# Altium PCB PCB1.PcbDoc
Units mil, origin at the board's own origin, x right, y up, seen from the top; angles counter-clockwise.
Board outline 2120 x 2320 mil, 2 copper layers (Top Layer, Bottom Layer); 22 components, 10 nets, 59 pads, 12 vias.
Unrouted connection lines stored in the file: 2.
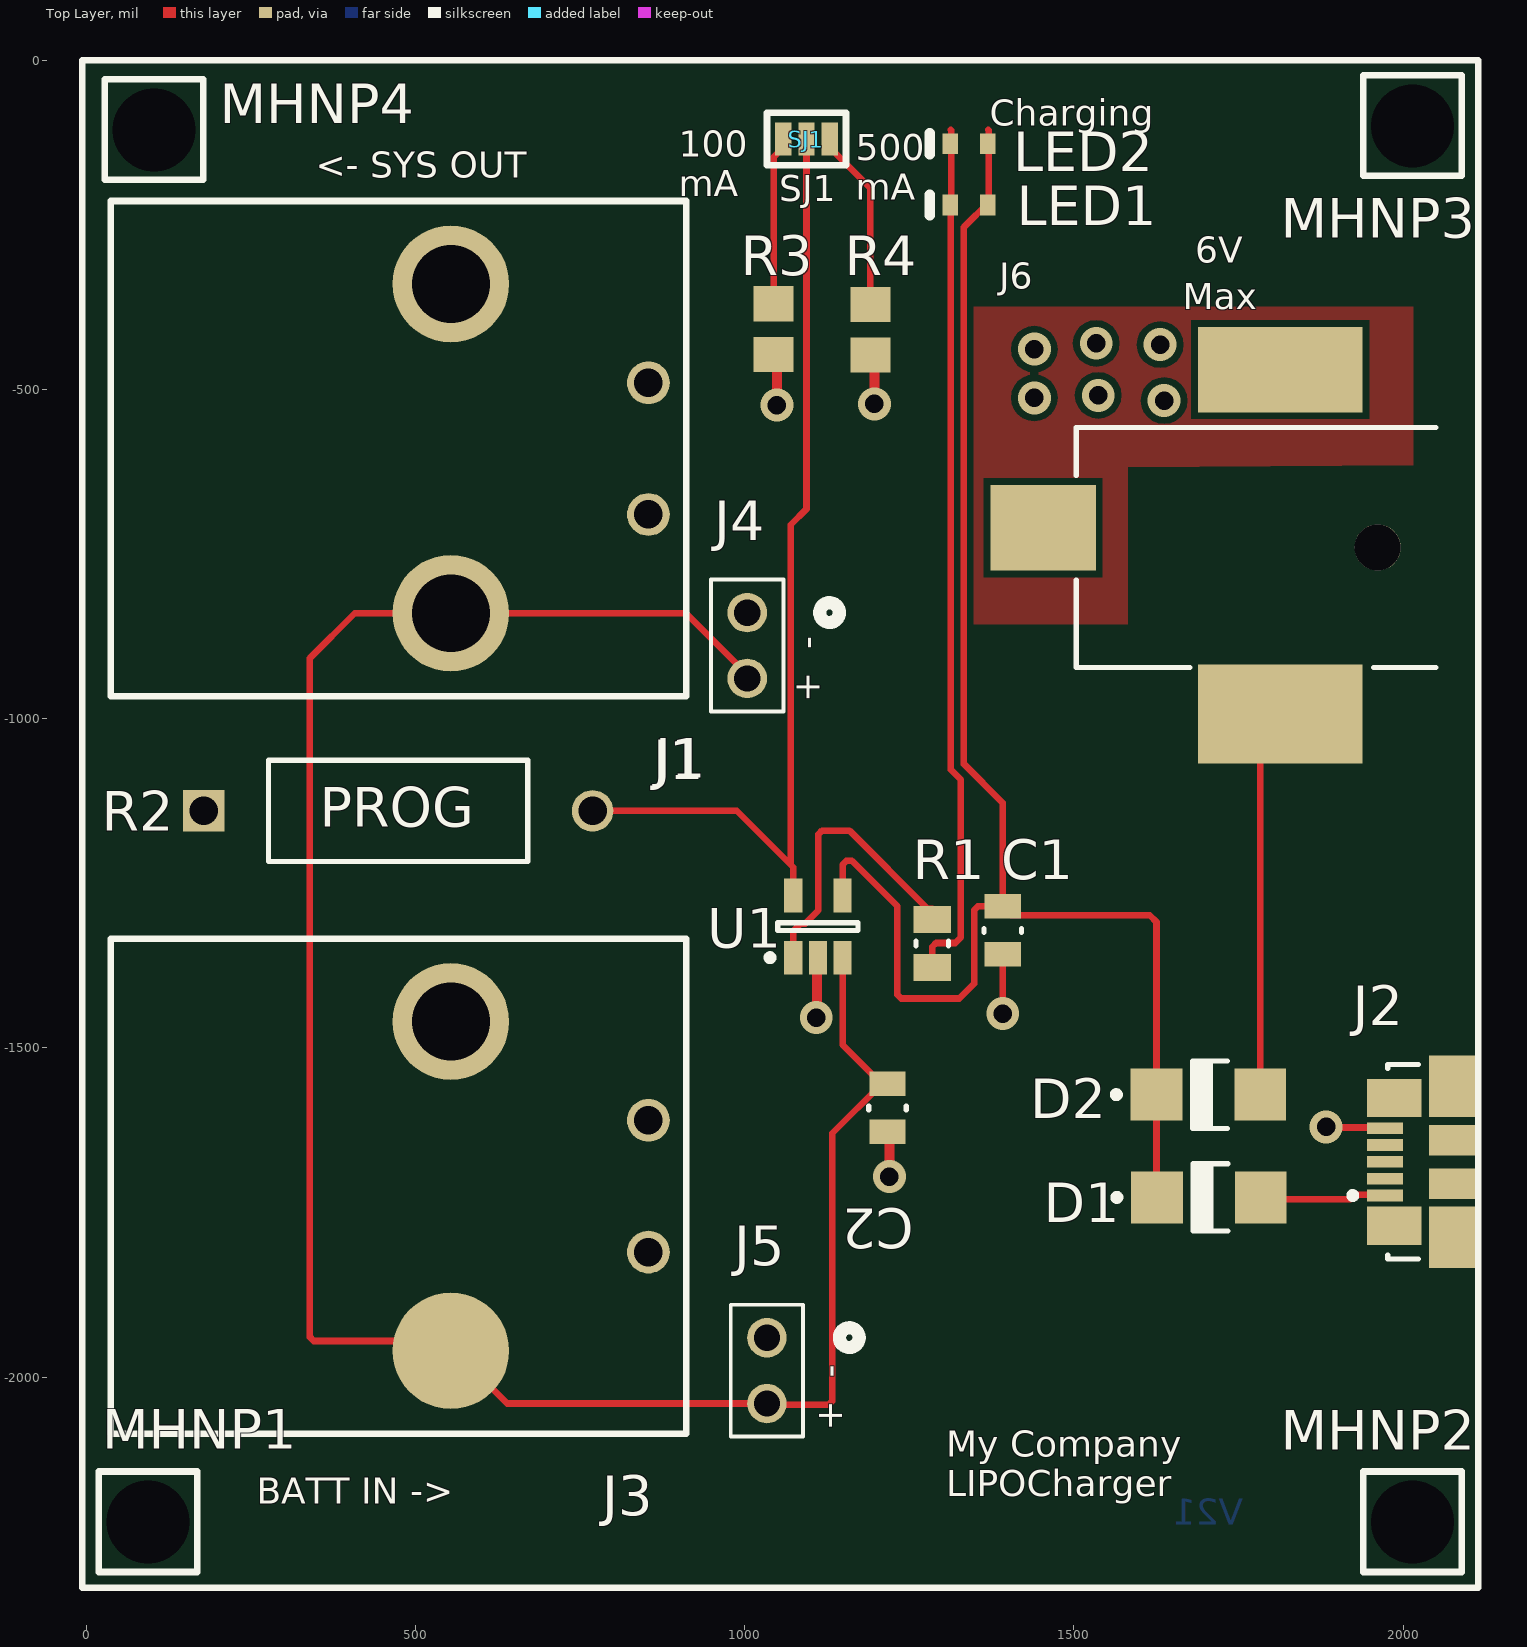
[diagram p0: Top Layer view]
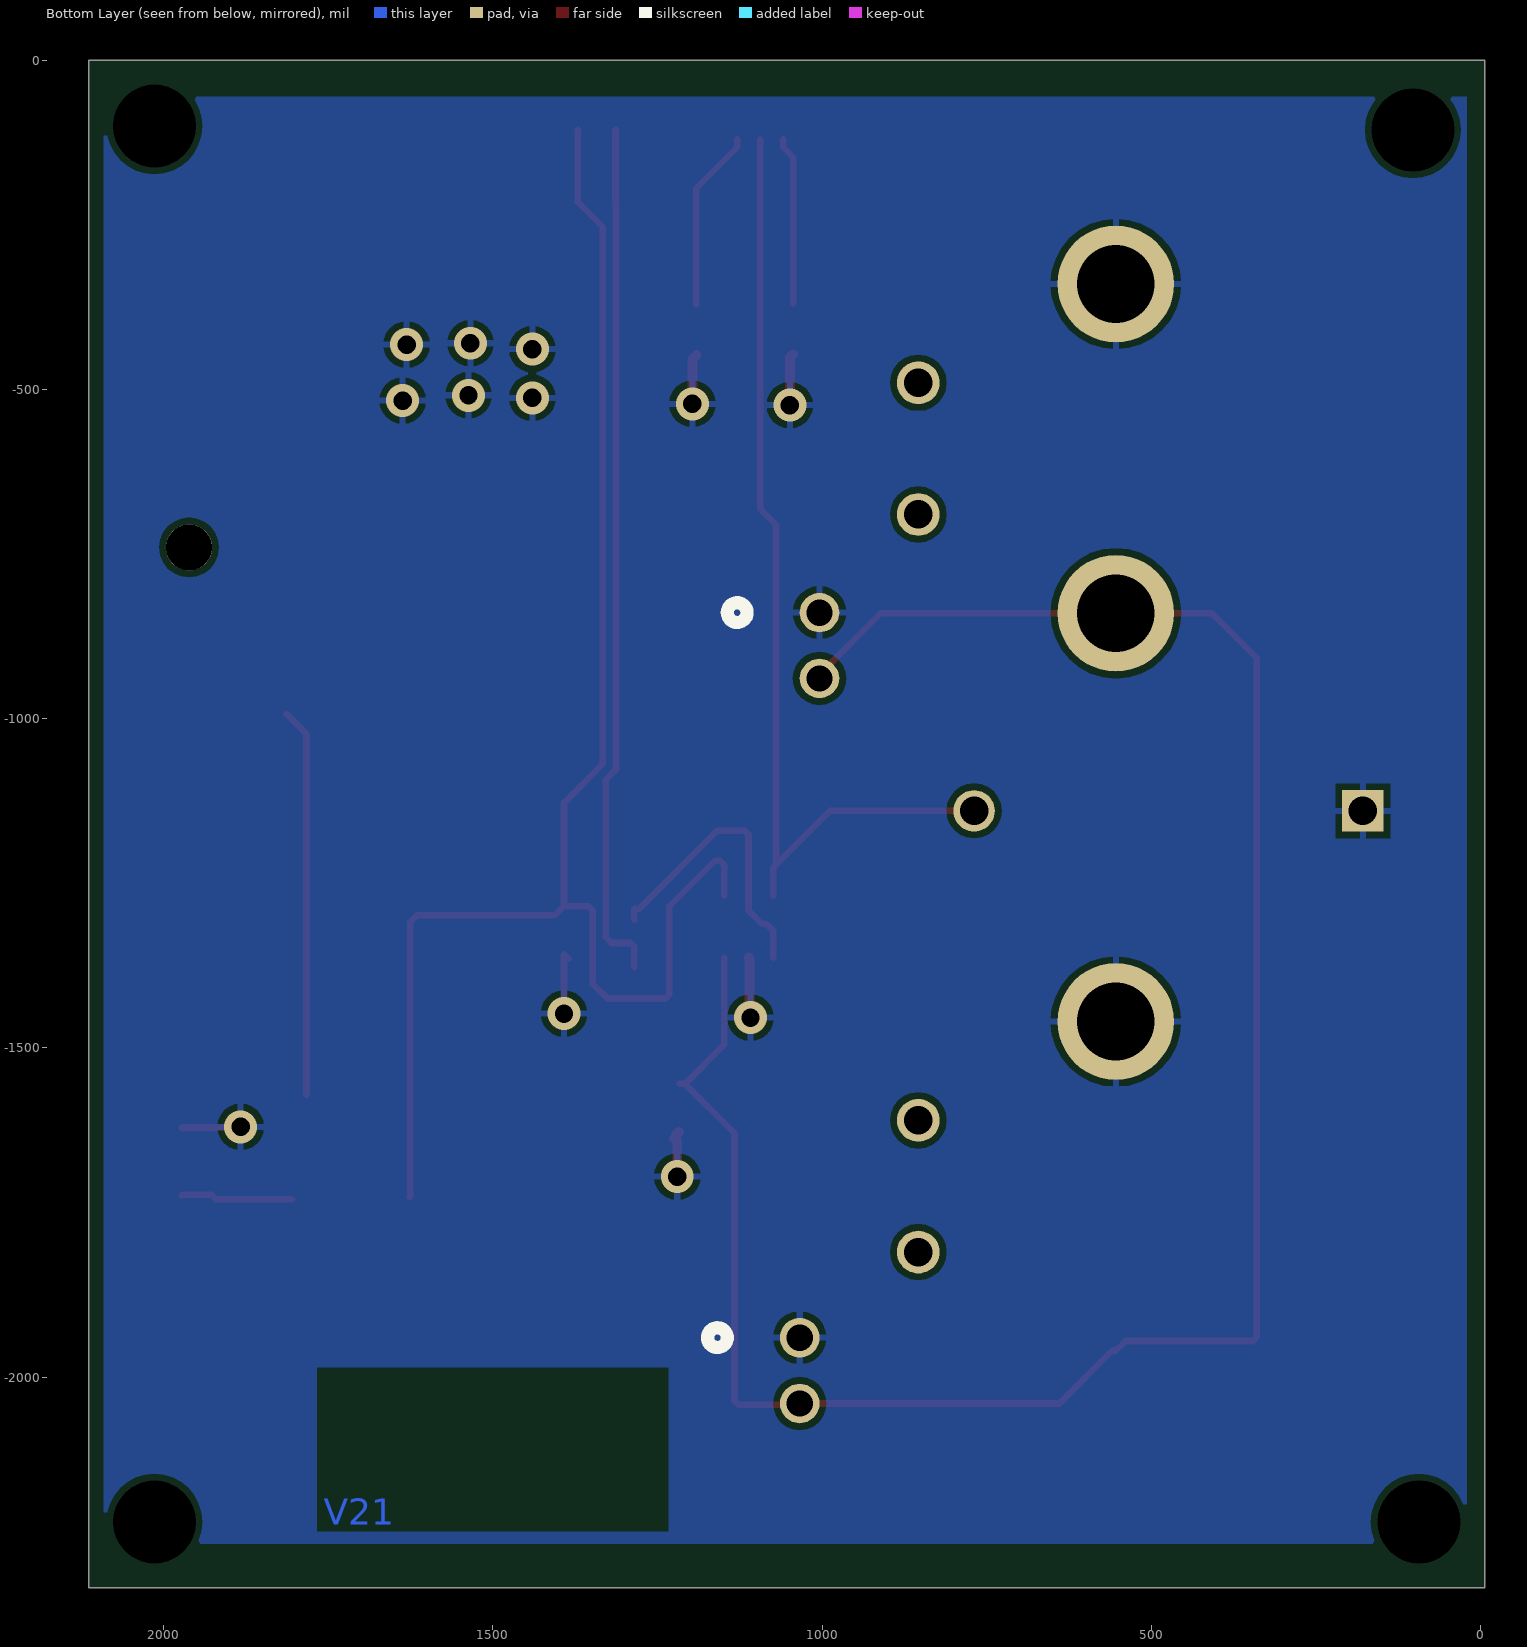
[diagram p1: Bottom Layer view, seen from below]

## Layer stack, top to bottom
Top Solder: solder mask 0.4, Solder Resist, Dk 3.5
Top Layer: signal copper 1.4
Dielectric 1: dielectric 12.6, FR-4, Dk 4.8
Bottom Layer: signal copper 1.4
Bottom Solder: solder mask 0.4, Solder Resist, Dk 3.5

## Board outline
-6,-2320 2114,-2320 2114,0 -6,0

## Design rules (kind name [scope] priority, off if disabled: settings)
Clearance [All] p1: gap=10 ignorepadtopadclearanceinfootprint=TRUE except(0: Arc-Hole Track-Hole SMDPad-Hole THPad-Hole Via-Hole Fill-Hole Poly-Hole Region-Hole Text-Hole)
PolygonConnect [All] p1: connectstyle=Relief reliefconductorwidth=10 reliefentries=4 polygonreliefangle="90 Angle" airgapwidth=10
RoutingVias [All] p1: holewidth=28 width=50 viastyle="Through Hole" minholewidth=28 minwidth=50 maxholewidth=28 maxwidth=50
SolderMaskExpansion [All] p1: expansion=4 istentingtop=FALSE
Width [All] p1: maxlimit=40 minlimit=10 preferedwidth=10
30 further rules are at their usual default settings.

## Components (designator, comment, footprint, x,y, rotation, side; value= is the part's Value field where it differs from the comment)
C1 "4.7uF" FP-CC0805-0_85-MFG 1392,-1321.42 r270 top value="4.7 uF"
C2 "4.7uF" FP-CC0805-0_85-MFG 1217,-1591 r270 top value="4.7 uF"
D1 "40V, 1A" ONSC-SMA-2-403D-02_V 1705,-1727 r0 top
D2 "40V, 1A" ONSC-SMA-2-403D-02_V 1704.26,-1571 r0 top
J1 "CONN HEADER R/A 2POS 5.08MM" 1-179276-2#1 554,-340 r270 top
J2 "47346-0001" MOLX-47346-0001-5_V 2069.13,-1673.03 r90 top
J3 "CONN HEADER R/A 2POS 5.08MM" 1-179276-2#2 554,-1460 r270 top
J4 "2 POS VERT HEADER 0.100\"" 2Pins_AMP 1004,-839 r180 top
J5 "2 POS VERT HEADER 0.100\"" 2Pins_AMP 1034,-1940 r180 top
J6 "CONN PWR JACK 2.1X5.5MM SOLDER" FP-RASM722PTR13X-MFG 1794,-740 r90 top
LED1 "RED" VISH-TLMS1000_V 1341,-220 r180 top
LED2 "RED" VISH-TLMS1000_V 1341,-127 r180 top
MHNP1 "Mounting Hole Non-Plated 3.2mm" MTHNP3P2MM 94,-2220 r90 top
MHNP2 "Mounting Hole Non-Plated 3.2mm" MTHNP3P2MM 2014,-2220 r90 top
MHNP3 "Mounting Hole Non-Plated 3.2mm" MTHNP3P2MM 2014,-100 r90 top
MHNP4 "Mounting Hole Non-Plated 3.2mm" MTHNP3P2MM 103,-106 r90 top
R1 "330" RESC2013X50X30NL20T20 1285,-1341.42 r90 top
R2 "PROG" VISH-A1-2_V2 474,-1140 r0 top
R3 "2k" RESC2013X70X40ML20T20 1044,-408.39 r270 top
R4 "10k" RESC2013X70X40ML20T20 1191,-409.61 r90 top
SJ1 "SJUMPER3POS" SJUMPER3POS-Footprint-1 1094,-120 r0 top
U1 "Charge Management Controller" SOT-23-OT5_M 1111.4,-1315.76 r90 top

## Footprints (in the part's own frame and the unit in brackets; to place one, negate y for a bottom-side part, rotate by r counter-clockwise, add the part's x,y. Pads: shape width x height; smd on the part's side, far side on the other; paste and mask are expansions set on the pad)
1-179276-2#1 [mm]
  round 4.5 hole 3: 1(0,0) 2(12.7,0)
  round 1.65 hole 1.1: ""(3.81,7.62) ""(8.89,7.62)
  silkscreen extent -3.2,-13.13 15.9,9.08, body extent -3.02,-13.55 16.06,8.55, height 10.86
1-179276-2#2 [mm]
  round 4.5 hole 3: 1(0,0)
  round 4.5 smd: 2(12.7,0)
  round 1.65 hole 1.1: ""(3.81,7.62) ""(8.89,7.62)
  silkscreen extent -3.2,-13.13 15.9,9.08, body extent -3.02,-13.55 16.06,8.55, height 10.86
2Pins_AMP [mil]
  round 60 hole 40 mask+0: 1(0,0) 2(0,100)
  silkscreen extent -140,-50 55,150, body extent 0,0 10,10, height 10
FP-CC0805-0_85-MFG [mm]
  rect 0.95x1.4 smd paste+0 mask+0: 1(-0.925,0) 2(0.925,0)
  silkscreen extent -0.08,-0.72 0.08,0.72, body extent -1.6,-1.05 1.6,1.05, height 0.25
FP-RASM722PTR13X-MFG [mm]
  rect 3.3x4.06 smd paste+0 mask+0: 1(0.76,8.65)
  rect 3.81x6.35 smd paste+0 mask+0: 2(-6.43,-0.49)
  rect 3.3x6.35 smd paste+0 mask+0: 3(6.86,-0.49)
  round 1.78 hole 1.78 unplated paste-1000 mask+0: ""(0,-4.25)
  silkscreen extent -4.63,-6.5 4.63,7.38, body extent -8.43,-7.48 8.61,10.78, height 0.25
MOLX-47346-0001-5_V [mm] "SMD, 5-Leads, Body 7.5x5mm, Pitch 0.65mm"
  rect 0.45x1.38 smd: 1(-1.3,2.46) 2(-0.65,2.46) 3(0,2.46) 4(0.65,2.46) 5(1.3,2.46)
  rect 1.475x2.1 smd: 6(-2.462,2.1) 7(2.462,2.1)
  rect 2.375x1.9 smd: 8(-2.913,-0.2) 11(2.913,-0.2)
  rect 1.175x1.9 smd: 9(-0.837,-0.2) 10(0.837,-0.2)
  silkscreen extent -3.75,1.16 3.75,3.82, body extent -3.99,-2.78 3.99,2.65, height 2.69
MTHNP3P2MM [mm]
  round 1 hole 3.2: ""(0,0)
  silkscreen extent -1.92,-1.9 1.95,1.9
ONSC-SMA-2-403D-02_V [mm]
  rect 2x2 smd: 1(-2,0) 2(2,0)
  silkscreen extent -3.67,-1.3 0.74,1.3, body extent -2.16,-1.3 2.16,1.3, height 2.2
RESC2013X50X30NL20T20 [mm]
  rect 1.05x1.45 smd: 1(-0.925,0) 2(0.925,0)
  silkscreen extent -0.1,-0.63 0.1,0.63, body extent -1.1,-0.72 1.1,0.72, height 0.5
RESC2013X70X40ML20T20 [mm]
  rect 1.35x1.55 smd: 1(-0.975,0) 2(0.975,0)
  body extent -1.1,-0.72 1.1,0.72, height 0.7
SJUMPER3POS-Footprint-1 [mil]
  rect 25x50 smd: 1(-35,0) 2(0,0) 3(35,0)
  silkscreen extent -60,-40 60,40
SOT-23-OT5_M [mm]
  rect 1.3x0.7 smd: 1(-1.2,0.95) 2(-1.2,0) 3(-1.2,-0.95) 4(1.2,-0.95) 5(1.2,0.95)
  silkscreen extent -1.32,-1.55 0.15,1.97, body extent -0.9,-1.55 0.9,1.55, height 1.45
VISH-A1-2_V2 [mm]
  rect 1.6x1.6 hole 1.1: 1(-7.5,0)
  round 1.6 hole 1.1: 2(7.5,0)
  silkscreen extent -5,-1.95 5,1.95, body extent -7.91,-1.95 7.92,1.95, height 3.88
VISH-TLMS1000_V [mm]
  rect 0.6x0.8 smd: 1(-0.725,0) 2(0.725,0)
  silkscreen extent 1.52,-0.4 1.52,0.4, body extent -0.8,-0.4 0.8,0.4, height 0.65

## Part data
C1 C2: library part "CAP CER 4.7UF 6.3V X7R 0805", "4.7µF ±10% 6.3V Ceramic Capacitor X7R 0805 (2012 Metric)", Capacitance="4.7 uF", Manufacturer=Yageo, Manufacturer Part Number=CC0805KKX7R5BB475, Package=CC0805-0.85, Supplier Part Number 1=311-3419-1-ND, Temperature="-30°C to +85°C", Temperature Characteristic=X7R, Temperature Range High=+85°C, Temperature Range Low=-30°C, Tolerance=0.1, Voltage Rating="6.3 V", Automotive=No, Category=Cap, ComponentLink2Description=Datasheet, ComponentLink2URL=http://www.yageo.com/documents/recent/UPY-GPHC_Y5V_6.3V-to-50V_8.pdf, Device Class L1="Passive Components", Device Class L2=Capacitors, Device Class L3="Ceramic Capacitors", Digikey Description="CAP CER 4.7UF 6.3V X7R 0805", Footprint Url=http://www.yageo.com/exep/pages/download/literatures/UPY-C_GEN_24.pdf, Height=0.95mm, Ipc Land Pattern Name=CAPC200125X85, Lead Free=Yes, Material=Ceramic, Mouser Description="Multilayer Ceramic Capacitors MLCC - SMD/SMT 4.7uF 6.3V X7R 10%", Octopart=https://octopart.com/cc0805kkx7r5bb475-yageo-27548069, RoHS=TRUE, Supplier 1=Digi-Key
D1 D2: library part "DIODE SCHOTTKY 40V 1A SMA", "Schottky Power Rectifier, 2-Pin SMA, Pb-Free, Cut Tape, Diode Schottky 40V 1A Surface Mount SMA", Manufacturer="ON Semiconductor", Manufacturer Part Number=MBRA140T3G, Supplier Part Number 1=MBRA140T3GOSCT-ND, ComponentLink1Description="Manufacturer URL", ComponentLink1URL=http://www.onsemi.com/, ComponentLink2Description=Datasheet, ComponentLink2URL=http://www.onsemi.cn/pub_link/Collateral/MBRA140T3-D.PDF, ComponentLink3Description="Package Specification", ComponentLink3URL=http://www.onsemi.com/pub_link/Collateral/403D-02.PDF, Configuration=Single, DatasheetVersion="Rev. 10", IFSM Max (A)=30, Mounting Technology="Surface Mount", PackageDescription="2-Pin Small Molded Package, J-Bend Lead, Body 2.605 x 4.315 mm", PackageReference=SMA-2-403D-02, PackageVersion="Rev. G, 07/2012", Packing="Tape and Reel", PartNumber=MBRA140T3G, RoHS=TRUE, Supplier 1=Digi-Key
J1 J3: "Connector Header Through Hole, Right Angle 2 position 0.200\" (5.08mm)", Manufacturer="TE Connectivity AMP Connectors", Manufacturer Part Number=1-179276-2, Supplier Part Number 1=A29545-ND, ComponentLink1Description="Product URL", ComponentLink1URL=https://www.te.com/usa-en/product-1-179276-2.html?te_bu=Cor&te_type=other&te_campaign=oct_glo_manufacturer&elqCampaignId=26136, Supplier 1=Digi-Key
J2: library part "CONN RCPT USB2.0 MICRO B SMD R/A", "Micro-USB B Receptacle with Flange, -30 to 85 degC, 5-Pin SMD, RoHS, Tape and Reel", Color=Black, Manufacturer=Molex, Maximum Current Rating=1.8/ContactA, Maximum Voltage Rating=30VAC, Operating Temperature=-30to85C, Supplier Part Number 1=WM17141CT-ND, Body Orientation=RightAngle, Contact Material=CopperAlloy, Contact Plating=GoldOverPalladiumNickelOverNickel, Datasheet URL=https://datasheet.ciiva.com/30075/304740473460001-io-nectors-30075527.pdf, Datasheet Version=Dec-13, Dimension=7.8x5.43x2.94mm, Gender=RCP, Housing Material=LiquidCrystalPolymer, Manufacturer Part Number=47346-0001, Manufacturer URL=http://www.molex.com/, Mounting=SurfaceMount, Number of Contacts=5, Number of Ports=1, Number of Terminals=5, Packaging=EmbossedTapeandReel, Pitch=0.65mm, RoHS=Yes, Supplier 1=Digi-Key, Termination Method=Solder, Type=MicroUSBTypeB
J4 J5: library part "CONN HEADER VERT 2POS 0.100\"", "Connector Header Through Hole 2 position", Manufacturer="Amphenol ICC (FCI)", Manufacturer Part Number=67997-402HLF, Supplier Part Number 1=609-5502-ND, Built_By=EMA_UL_Team, Copyright="Copyright (C) 2018 Accelerated Designs. All rights reserved", RefDes=RefDes, SourceLibrary=Amphenol_2013-08-06_Bergstik_2Row_67997, Supplier 1=Digi-Key
J6: "Power Barrel Connector Jack 2.10mm ID (0.083\"), 5.50mm OD (0.217\") Surface Mount, Right Angle", Case/Package=SMD/SMT, Color=Black, Current Rating=5A, Manufacturer=Switchcraft, Manufacturer Part Number=RASM722PTR13X, Package Quantity=120, Supplier Part Number 1=SC2028-1-ND, Connector Type=Jack, Contact Material="Copper Alloy", Contact Plating=Tin, Gender=Male, Housing Color=Black, Housing Material=Thermoplastic, Mount="Surface Mount", Shielding=Unshielded, Supplier 1=Digi-Key, Termination=Solder
LED1 LED2: library part "LED RED 0603 SMD", "Low Current LED, 40 mW, 1.8 V, -40 to 100 degC, 2-Pin SMD (0603), RoHS, Tape and Reel", Forward Current If=2mA, Forward Voltage=1.8V, LED Colour=Red, Manufacturer=Vishay, Manufacturer Part Number=TLMS1000-GS08, Package Description="2-Pin Surface Mount Device, Body 1.6 x 0.8 mm", Package Reference=TLMS1000, Supplier Part Number 1=TLMS1000-GS08CT-ND, Automotive Qualification Standard=AEC-Q100, Bulb Size=1.6mmx0.8mm, Datasheet URL=https://datasheet.ciiva.com/5798/1698881-5798337.pdf, Datasheet Version="Rev. 1.7, 02/2011", LED Mounting=SMD, Lens Shape=Rectangular, Luminous Intensity=4mcd, Manufacturer URL=http://www.vishay.com/, Mounting Technology=SurfaceMount, MSL=MSL2-1year, Packaging=CutTape, Product Range=-, Supplier 1=Digi-Key, SVHC=ToBeAdvised, Viewing Angle=80°, Wavelength Typ=636nm
MHNP1 MHNP2 MHNP3 MHNP4: library part MTHNP3P2MM, "Mounting Hole Non-Plated 3.2 mm drill hole", Manufacturer=N/A, Manufacturer Part Number=N/A
R1: library part "RES SMD 330 OHM 1% 1/8W 0805", "330 Ohms ±1% 0.125W, 1/8W Chip Resistor 0805 (2012 Metric) Automotive AEC-Q200 Thick Film", Manufacturer=Vishay, Manufacturer Part Number=CRCW0805330RFKEA, Supplier Part Number 1=541-330CCT-ND, Supplier 1=Digi-Key
R2: library part "RES 62K OHM 2W 5% AXIAL", "Power Metal Film Leaded Resistor, 62 KOhm +/-5%, 2 W, 2-Pin THD, RoHS, Ammo Pack62 kOhms ±5% 2W Through Hole Resistor Axial Automotive AEC-Q200, Flame Retardant Coating, Safety Metal Film", Manufacturer="Vishay Semiconductor", Manufacturer Part Number=PR02000206202JR500, PartNumber=PR02000206202JA100, Power="2 W", Resistance="62 KOhm", Supplier Part Number 1=PPC62KW-2CT-ND, Temperature Coefficient="+/-250 ppm/degC", Tolerance=+/-5%, ComponentLink1Description="Manufacturer URL", ComponentLink1URL=http://www.vishay.com/, ComponentLink2Description=Datasheet, ComponentLink2URL=http://www.vishay.com/docs/28729/28729.pdf, ComponentLink3Description="Package Specification", ComponentLink3URL=http://www.vishay.com/docs/28729/28729.pdf, DatasheetVersion=Jun-13, Mounting Technology="Through Hole", PackageDescription="2-Pin Axial Lead, Body 10 x 3.9 mm", Packing="Ammo Pack", RoHS=TRUE, Supplier 1=Digi-Key
R3: library part "RES SMD 2K OHM 5% 1/8W 0805", "2 kOhms ±5% 0.125W, 1/8W Chip Resistor 0805 (2012 Metric) Automotive AEC-Q200 Thick Film", Manufacturer=Panasonic, Manufacturer Part Number=ERJ-6GEYJ202V, Supplier Part Number 1=P2.0KACT-ND, Supplier 1=Digi-Key
R4: library part "RES SMD 10K OHM 1% 1/8W 0805", "10 kOhms ±1% 0.125W, 1/8W Chip Resistor 0805 (2012 Metric) Automotive AEC-Q200 Thick Film", Manufacturer=Panasonic, Manufacturer Part Number=ERJ-6ENF1002V, Supplier Part Number 1=P10.0KCCT-ND, Supplier 1=Digi-Key
SJ1: "Solder jumper 3 pads and pins", Manufacturer=N/A, Component Type=Miscellaneous, Manufacturer Part Number=N/A, Pins=3
U1: library part "IC LI-ION/LI-POLY CTRLR SOT23-5", "Simple, Miniature Single-Cell, Fully Integrated Li-Ion/Li-Polymer Charge Management Controller, 4.2V, 5-Pin SOT-23, Industrial Temperature, Cut Tape", Manufacturer=Microchip, Manufacturer Part Number=MCP73811T-420I/OT, Supplier Part Number 1=MCP73811T-420I/OTCT-ND, Code_IPC=SOT23-5, DatasheetVersion="revB, Sep-2007", PackageDescription="5-Lead Plastic Small Outline Transistor (OT) [SOT-23]", PackageReference=SOT-23-OT5, PackageVersion="revBB, Aug-2009", Supplier 1=Digi-Key

## Via types
v1: diameter 50, hole 28, Top Layer to Bottom Layer, 12 vias

## Nets (pads, with @x,y where several pads share a name; then routed paths per layer and width w, separated by ;. In a path a pad name is that pad's centre, name@x,y a point inside that pad or via, vN(x,y) a via of type N, cw(c..) or ccw(c..) an arc to the next point about the centre after c; other vN are vias at no path point)
GND: C1.2 C2.2 J1.1 J2.5 J3.1 J4.1 J5.1 J6.1 J6.3 R2.1 R3.2 R4.1 U1.2 | length 512
  Top Layer w10: C1.2@1385,-1364.83 C1.2 v1(1392,-1447.83) ; v1(1883,-1620) 1883.92,-1620.92 1971.35,-1620.92 J2.5
  Top Layer w15: R3.2 1049,-451.77 v1(1049,-524) ; v1(1108.8,-1454) 1110.1,-1452.7 1110.1,-1364.3 U1.2 ; R4.1 1197,-454 v1(1197,-522) ; C2.2 1223,-1633.42 1222,-1634.42 1225,-1637.42 1220,-1642.42 v1(1220,-1695.42)
  other v1: 1637,-517 1440,-513 1537,-509 1440,-439 1631,-432 1534,-430
NetC1_1: C1.1 D1.1 D2.1 LED1.1 LED2.1 U1.4 | length 2462.7
  Top Layer w10: U1.4 1148.8,-1221.8 1154.66,-1215.95 1162.95,-1215.95 1232,-1285 1232,-1419.14 1237.86,-1425 1326,-1425 1348.54,-1402.46 1348.54,-1290.86 1354.4,-1285 C1.1 ; 1370.09,-106 1370.81,-106.73 1370.81,-214.27 1371.54,-215 1333,-253.54 1333,-1069 1392,-1128 C1.1 ; D1.1 1625.52,-1726.26 D2.1 1625.52,-1308.86 1615.36,-1298.7 1405.7,-1298.7 C1.1
NetC2_1: C2.1 J1.2 J3.2 J4.2 J5.2 U1.3 | length 3343.6
  Top Layer w10: J4.2 1004,-933 911,-840 J1.2 408,-840 340,-908 340,-1939.14 345.86,-1945 539,-1945 J3.2 559.62,-1960 639.62,-2040 J5.2 1036,-2042 1127.14,-2042 1133,-2036.14 1133,-1629.72 C2.1@1208.14,-1554.58 ; U1.3 1148.8,-1495.24 C2.1@1208.14,-1554.58 ; C2.1 C2.1@1208.14,-1554.58
NetD1_2: D1.2 J2.1 | length 170.9
  Top Layer w10: D1.2@1804.74,-1730 1920,-1730 1927,-1723 1971.07,-1723 J2.1
NetD2_2: D2.2 J6.2 | length 590.4
  Top Layer w10: D2.2 1783,-1023.44 J6.2
NetLED1_2: LED1.2 LED2.2 R1.1 | length 1313.8
  Top Layer w10: R1.1 1285,-1346.53 1290.86,-1340.67 1319.76,-1340.67 1328.54,-1331.88 1328.54,-1092.83 1313,-1077.28 1313,-215 1313.73,-214.27 1313.73,-106.73 1313,-106
NetR1_2: R1.2 U1.1 | length 447.6
  Top Layer w10: U1.1 1074,-1322.41 1085.05,-1311.36 1091.73,-1311.36 1111.87,-1291.23 1111.87,-1175.86 1117.72,-1170 1159.13,-1170 1278.13,-1289 1285,-1289 R1.2
NetR2_2: R2.2 SJ1.2 U1.5 | length 1494.8
  Top Layer w10: R2.2 988,-1140 1070,-1222 ; U1.5 1074,-1226 1070,-1222 ; SJ1.2 1094,-681.72 1070,-705.72 1070,-1222
NetR3_1: R3.1 SJ1.1 | length 256.2
  Top Layer w10: R3.1 1044,-147.5 1059,-132.5 SJ1.1
NetR4_2: R4.2 SJ1.3 | length 276.9
  Top Layer w10: SJ1.3 1129,-132.5 1191,-194.5 R4.2
pads on no net: J1. J2.2 J2.3 J2.4 J2.6 J2.7 J2.8 J2.9 J2.10 J2.11 J3. J6. MHNP1. MHNP2. MHNP3. MHNP4.

## Polygon pours and split planes (outlines as drawn)
no net on Top Layer "NONET_L01_P004" (solid, pour order 4): 2015,-374.92 2015,-615.2 1582,-618.49 1582,-857 1343,-857 1343,-374.92
GND on Bottom Layer "GND_L02_P003" (solid, pour order 3): 20.78,-55.53 2090.78,-55.53 2090.78,-2253 20.78,-2253

## Other copper
Bottom Layer:
  text "V21" at 1757,-2224 h40

## Silkscreen, mask and mechanical layers (free items; w line width, h text height)
Top Overlay:
  the board outline again, w10
  text "Charging" at 1372,-100 h40
  text "<- SYS OUT" at 349,-179 h40
  text "100 / mA" at 900,-207 h40
  text "500 / mA" at 1169,-212 h40
  text "6V" at 1684,-308 h40
  text "J6" at 1387,-347 h40
  text "Max" at 1665,-378 h40
  text "10 / mA" at 9216,-899 h40
  text "+  -" at 1114,-975 h40 r90
  text "PROG" at 355,-1164 h60
  text "+  -" at 1148,-2081 h40 r90
  text "My Company  / LIPOCharger" at 1306,-2181 h40
  text "BATT IN ->" at 259,-2191.99 h40

## Text inside footprints (layer, text, board x,y; h text height)
J2: Mechanical 6 "PCB EDGE" at 2138.3,-1956.49 h11.81 r90
J4: Mechanical 7 "Default Padstyle: EX60Y60D40P" at 1366.5,-634 h50 r180; Mechanical 7 "1st Mtg Padstyle: EX80Y80D50P" at 1366.5,-559 h50 r180; Mechanical 7 "2nd Mtg Padstyle: EX70Y70D70P" at 1366.5,-484 h50 r180; Mechanical 7 "3rd Mtg Padstyle: EX70Y70D70P" at 1366.5,-409 h50 r180; Mechanical 7 "Left Mtg Padstyle: EX60Y60D30P" at 1379,-334 h50 r180; Mechanical 7 "Right Mtg Padstyle: EX60Y60D30P" at 1391.5,-259 h50 r180; Mechanical 7 "Alt Padstyle 1: OX60Y90D30P" at 1341.5,-184 h50 r180; Mechanical 7 "Alt Padstyle 2: OX90Y60D30P" at 1341.5,-109 h50 r180; Mechanical 7 "0.1in/2.54mm" at 1129,-1089 h25 r180; Mechanical 7 "0.1in/2.54mm" at 1079,-1414 h25 r180; Mechanical 7 "0.1in/2.54mm" at 834,-876.5 h25 r180; Mechanical 7 "0.095in/2.413mm" at 1671.5,-924 h25 r180; Mechanical 7 "0.19in/4.826mm" at 1609,-876.5 h25 r180
J5: Mechanical 7 "Default Padstyle: EX60Y60D40P" at 1396.5,-1735 h50 r180; Mechanical 7 "1st Mtg Padstyle: EX80Y80D50P" at 1396.5,-1660 h50 r180; Mechanical 7 "2nd Mtg Padstyle: EX70Y70D70P" at 1396.5,-1585 h50 r180; Mechanical 7 "3rd Mtg Padstyle: EX70Y70D70P" at 1396.5,-1510 h50 r180; Mechanical 7 "Left Mtg Padstyle: EX60Y60D30P" at 1409,-1435 h50 r180; Mechanical 7 "Right Mtg Padstyle: EX60Y60D30P" at 1421.5,-1360 h50 r180; Mechanical 7 "Alt Padstyle 1: OX60Y90D30P" at 1371.5,-1285 h50 r180; Mechanical 7 "Alt Padstyle 2: OX90Y60D30P" at 1371.5,-1210 h50 r180; Mechanical 7 "0.1in/2.54mm" at 1159,-2190 h25 r180; Mechanical 7 "0.1in/2.54mm" at 1109,-2515 h25 r180; Mechanical 7 "0.1in/2.54mm" at 864,-1977.5 h25 r180; Mechanical 7 "0.095in/2.413mm" at 1701.5,-2025 h25 r180; Mechanical 7 "0.19in/4.826mm" at 1639,-1977.5 h25 r180